# Altium PCB Power Circuit.PcbDoc
Units mm, origin at the board's own origin, x right, y up, seen from the top; angles counter-clockwise.
Board outline 131 x 104 mm, 2 copper layers (Top Layer, Bottom Layer), stack 1.1 mm thick; 30 components, 16 nets, 76 pads, 2 vias.
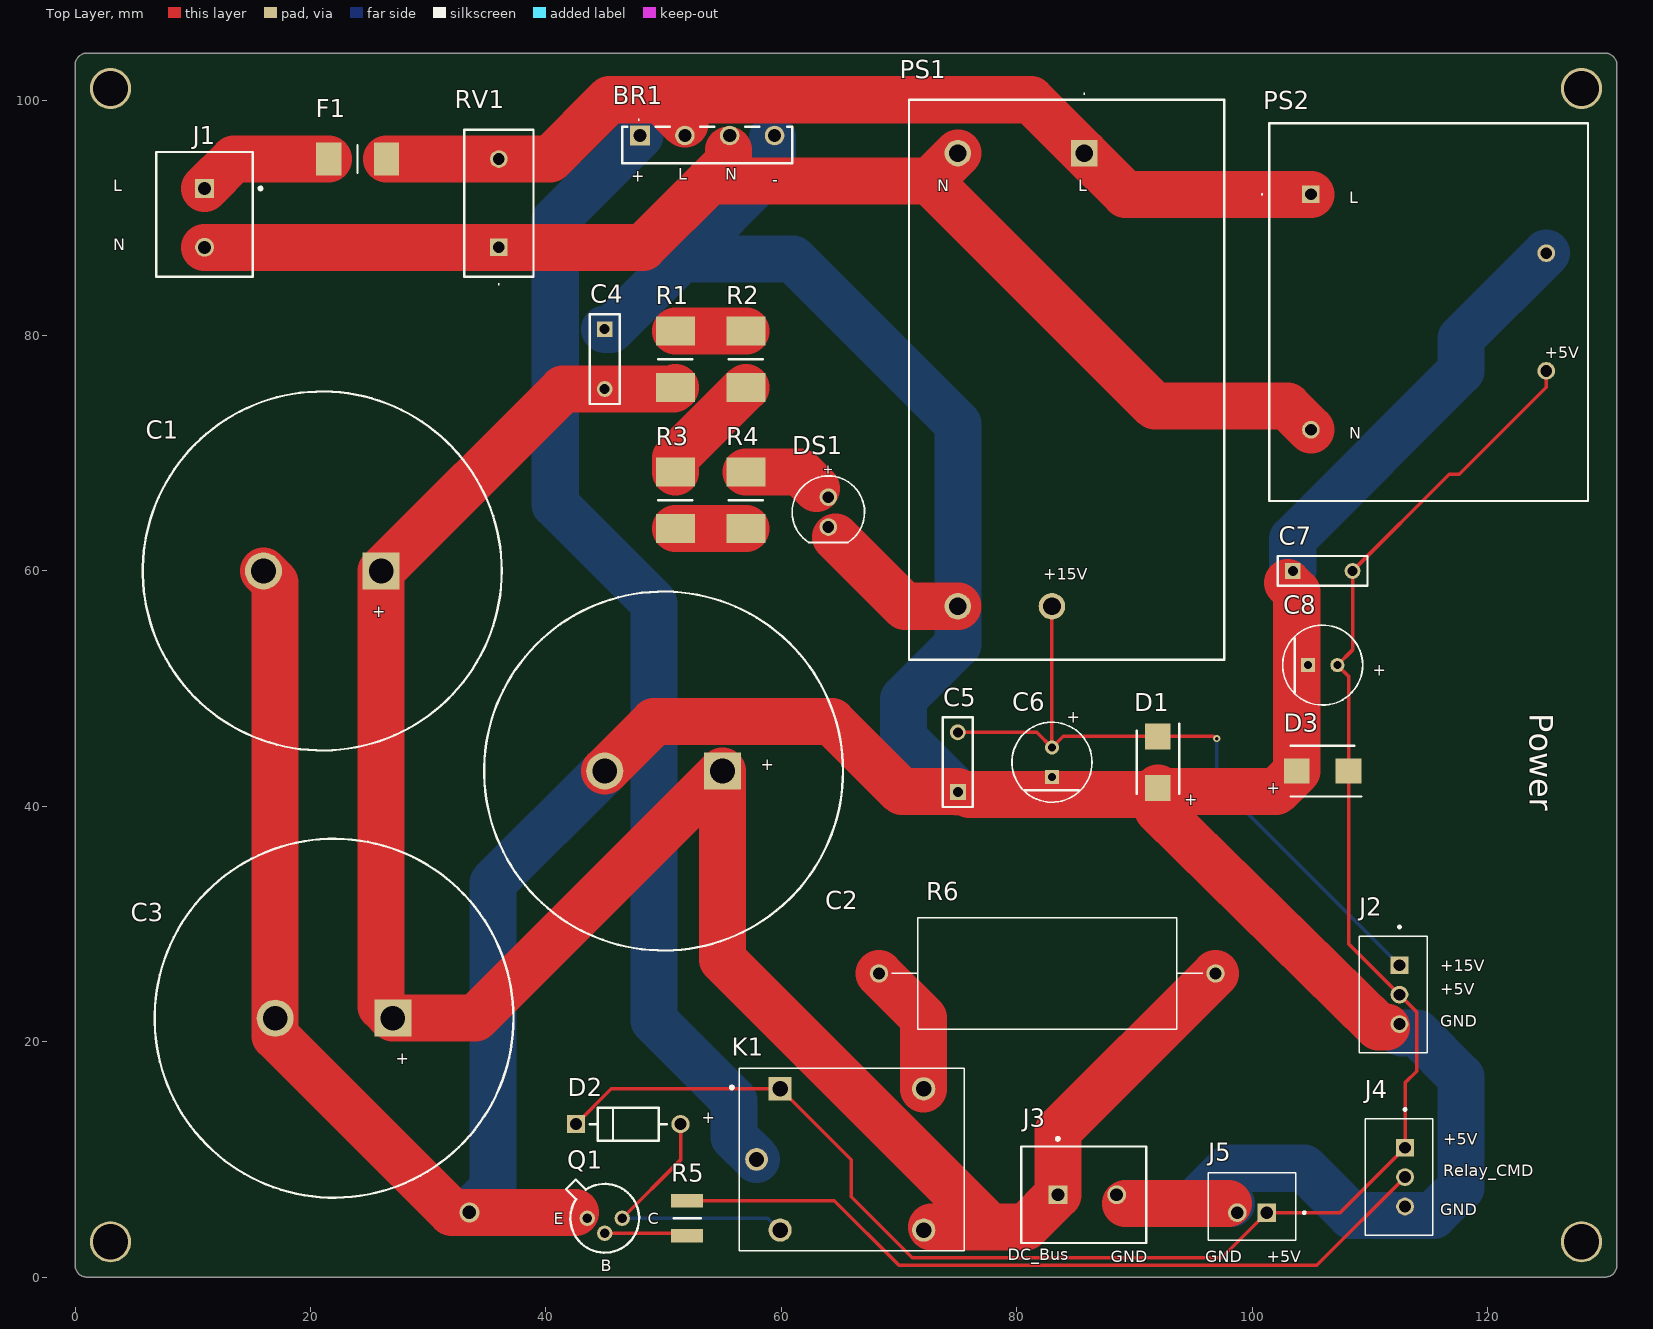
[diagram p0: Top Layer view]
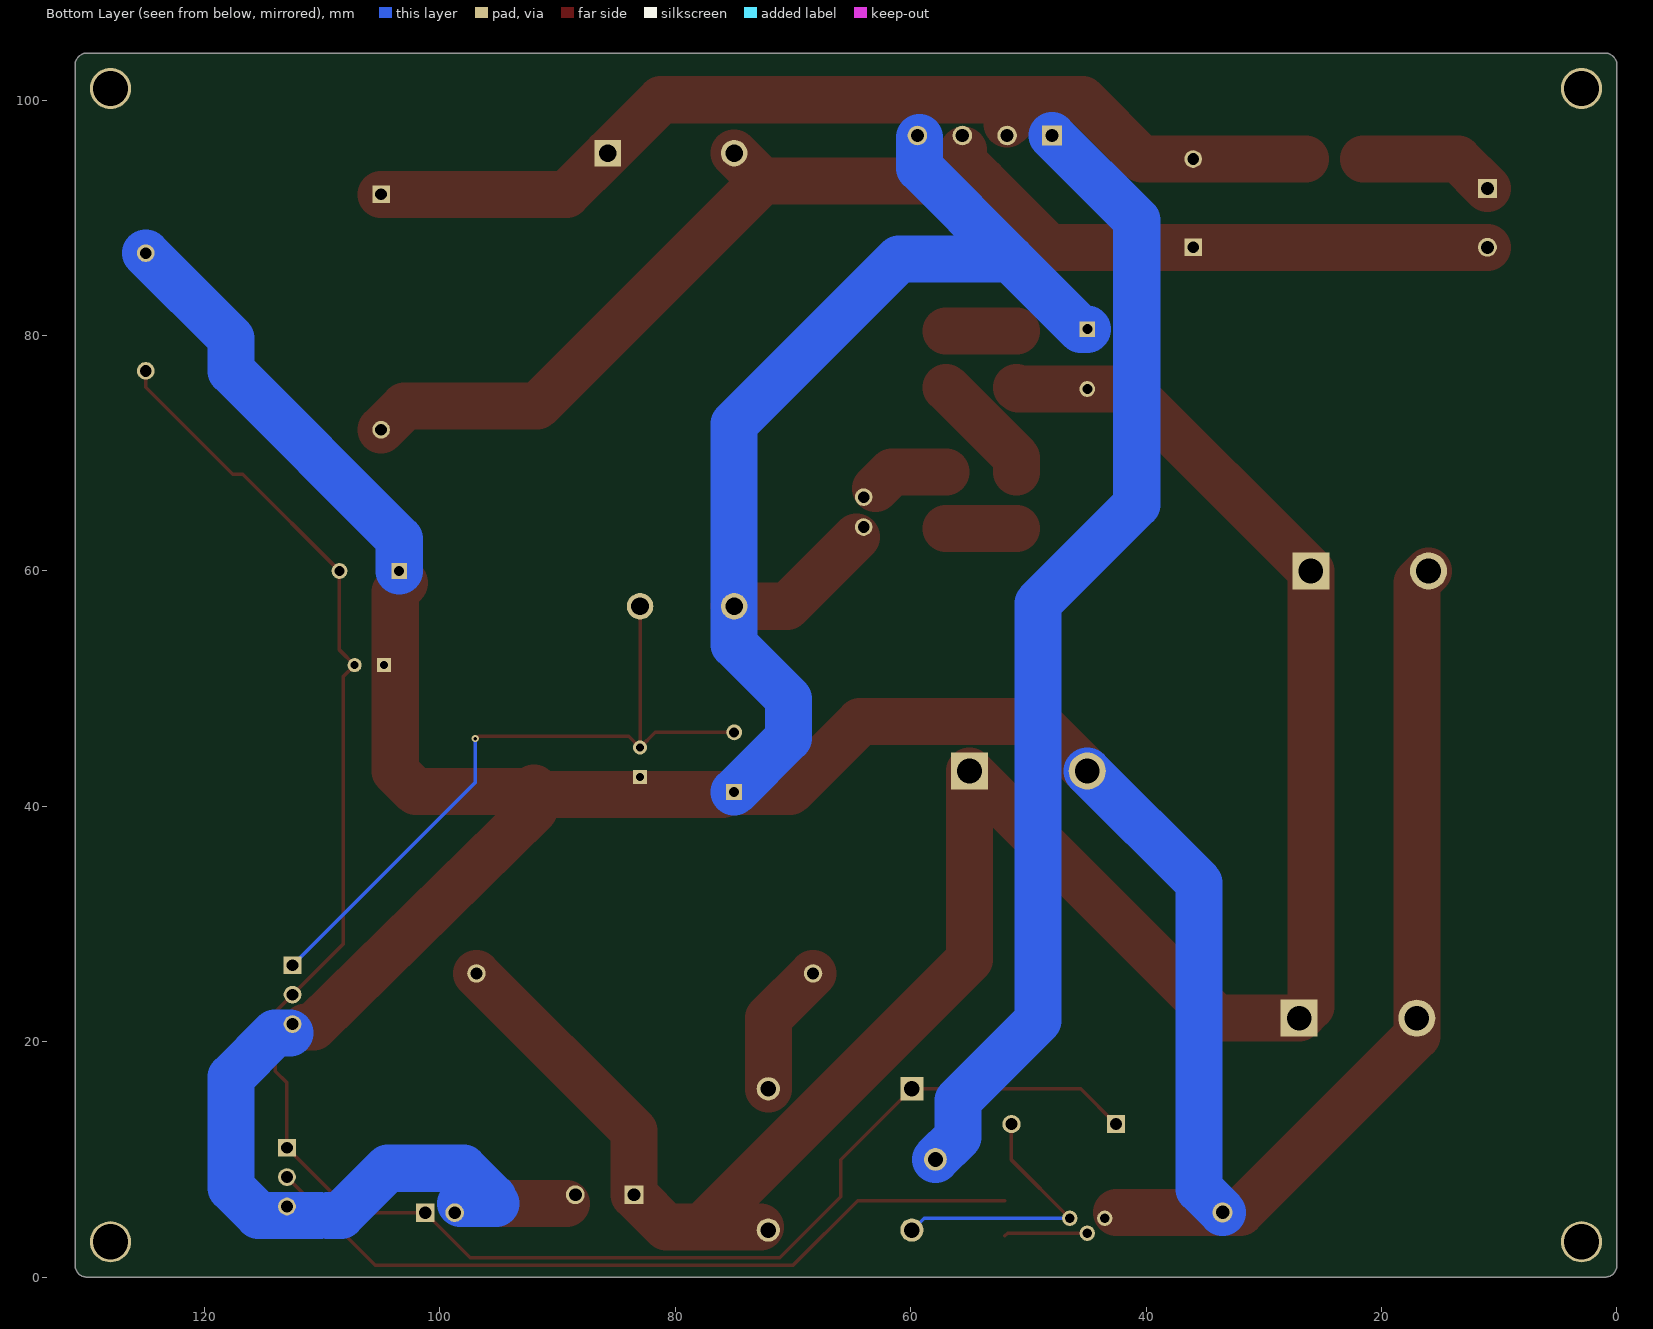
[diagram p1: Bottom Layer view, seen from below]

## Layer stack, top to bottom
Top Solder: solder mask 0.05, Solder Resist, Dk 3.5
Top Layer: signal copper 0.1
Dielectric 1: dielectric 0.9, FR-4, Dk 4.8
Bottom Layer: signal copper 0.1
Bottom Solder: solder mask 0.05, Solder Resist, Dk 3.5

## Board outline
1,0 cw(c1,1) 0,1 0,103 cw(c1,103) 1,104 130,104 cw(c130,103) 131,103 131,1 cw(c130,1) 130,0

## Design rules (kind name [scope] priority, off if disabled: settings)
BoardOutlineClearance [All] p1: gap=0.2 ignorepadtopadclearanceinfootprint=FALSE
Clearance [All] p1: gap=0.203 ignorepadtopadclearanceinfootprint=FALSE except(0.25: Arc-Hole Track-Hole SMDPad-Hole THPad-Hole Via-Hole Fill-Hole Poly-Hole Region-Hole Text-Hole)
ComponentClearance [All] p1: gap=0.127 collisioncheckmode=3 verticalgap=0.127 showdistances=TRUE
DiffPairsRouting [All] p1: maxlimit=0.381 minlimit=0.203 mostfreqgap=0.203 toplayer_minwidth=0.203 toplayer_maxwidth=25.4 toplayer_prefwidth=0.203 bottomlayer_minwidth=0.203 bottomlayer_maxwidth=25.4 bottomlayer_prefwidth=0.203 maxuncoupledlength=12.7
Height [All] p1: minheight=0 maxheight=1816.048 prefheight=12.7
HoleSize [All] p1: absolutevalues=TRUE maxlimit=6.3 minlimit=0.3 maxpercent=80.000 minpercent=20.000
HoleToHoleClearance [All] p1: gap=0.25 allowstackedmicrovias=FALSE
MinimumAnnularRing [All] p1: minimumring=0.076
MinimumSolderMaskSliver [All] p1: minsoldermaskwidth=0
PlaneClearance [All] p1: clearance=0.203
PlaneConnect PlaneConnectPowerPads [InPadClass('PowerPads')] p1: planeconnectstyle=Direct reliefexpansion=0.508 reliefentries=4 reliefconductorwidth=0.254 reliefairgap=0.254
PlaneConnect [All] p2: pad.planeconnectstyle=Relief pad.reliefexpansion=0.3 pad.reliefentries=4 pad.reliefconductorwidth=0.203 pad.reliefairgap=0.203 via.planeconnectstyle=Direct via.reliefexpansion=0.3 via.reliefentries=4 via.reliefconductorwidth=0.127 via.reliefairgap=0.127
PolygonConnect PolygonConnectPowerPads [All vs (InPadClass('PowerPads'))] p1: connectstyle=Direct reliefconductorwidth=0.254 reliefentries=4 polygonreliefangle="90 Angle" airgapwidth=0.254
PolygonConnect [All] p2: thpad.connectstyle=Relief thpad.reliefconductorwidth=0.203 thpad.reliefentries=4 thpad.polygonreliefangle="90 Angle" thpad.airgapwidth=0.203 smdpad.connectstyle=Relief smdpad.reliefconductorwidth=0.203 smdpad.reliefentries=4 smdpad.polygonreliefangle="90 Angle" smdpad.airgapwidth=0.203 via.connectstyle=Direct via.reliefconductorwidth=0.127 via.reliefentries=4 via.polygonreliefangle="90 Angle" via.airgapwidth=0.127
RoutingVias [All] p1: holewidth=0.3 width=0.6 viastyle="Through Hole" minholewidth=0.3 minwidth=0.6 maxholewidth=0.6 maxwidth=6.6
SilkToSilkClearance [All] p1: silktosilkclearance=0
SilkToSolderMaskClearance [IsPad] p1: minsilkscreentomaskgap=0.127 clearancetoexposedcopper=TRUE
SolderMaskExpansion [All] p1: expansion=0.075 istentingtop=FALSE
Width [All] p1: maxlimit=4 minlimit=0.3 preferedwidth=0.3
20 further rules are at their usual default settings.

## Components (designator, comment, footprint, x,y, rotation, side; value= is the part's Value field where it differs from the comment)
BR1 "RDXK810_T0_00601" RDXK810_T0_00601 48,97 r0 top
C1 "330uF/450V" CAPPRD1000W190D3050H3200 26,60 r180 top
C2 "330uF/450V" CAPPRD1000W190D3050H3200 55,43 r180 top
C3 "330uF/450V" CAPPRD1000W190D3050H3200 27,22 r180 top
C4 "220nF/400V" FP-CK06BX105K-MFG 45,78 r270 top
C5 "1uF/50V" FP-CK06BX105K-MFG 75,43.75 r90 top
C6 "100uF/25V" FP-RAD-TH-D_6_3_0_5-L_11-MFG 83,43.75 r90 top
C7 "1uF/50V" FP-CK06BX105K-MFG 106,60 r0 top
C8 "150uF/16V" FP-RAD-TH-D_6_3_0_5-L_11-MFG 106,52 r0 top
D1 "SMBJ20A" DIOM5436X244N 92,43.75 r270 top
D2 "1N4007" FP-1N4007-MFG 47,13 r0 top value=15pF
D3 "SMBJ7.0A" DIOM5443X244N 106,43 r180 top
DS1 "151051RS11000" WL-TMRC_D5.9H8.7 64,65 r270 top
F1 "0679H8000-05" FUSC6125X279N 24,95 r0 top
J1 "282836-2" TECO-282836-2_V 11,90 r270 top
J2 "B3B-XH-A_(LF)(SN)" "JST_B3B-XH-A (LF)(SN)" 112,24 r90 top
J3 "282836-2" TECO-282836-2_V 86,7 r0 top
J4 "B3B-XH-A_(LF)(SN)" "JST_B3B-XH-A (LF)(SN)" 112.475,8.5 r90 top
J5 "B2B-XH-A_(LF)(SN)" JST_B2B-XH-A_(LF)(SN) 100,6 r0 top
K1 "SRD-05VDC-SL-C" RELAY_SRD-05VDC-SL-C 66,10 r0 top
PS1 "PSK-15D-15" PSK15D15 85.75,95.5 r270 top
PS2 "RAC05E-05SKT" RAC05E05SKT 105,92 r0 top
Q1 "2N2222" MLTC-TO-18-3 45,5 r0 top
R1 "10K" RESC6331X80N 51,78 r90 top
R2 "10K" RESC6331X80N 57,78 r270 top
R3 "10K" RESC6331X80N 51,66 r270 top
R4 "10K" RESC6331X80N 57,66 r90 top
R5 "1K" RESC3225X70N 52,5 r270 top
R6 "1K" RESAD2860W80L2200D950 82.6,25.8 r180 top
RV1 "MOV-10D561KTR" MOV10D561KTR 36,87.5 r90 top

## Footprints (in the part's own frame and the unit in brackets; to place one, negate y for a bottom-side part, rotate by r counter-clockwise, add the part's x,y. Pads: shape width x height; smd on the part's side, far side on the other; paste and mask are expansions set on the pad)
CAPPRD1000W190D3050H3200 [mm]
  rect 3.15x3.15 hole 2.1: 1(0,0)
  round 3.15 hole 2.1: 2(10,0)
  silkscreen extent -10.25,-15.25 20.25,15.25, body extent -15.49,-20.49 25.49,20.49, height 34.13
DIOM5436X244N [mm]
  rect 2.2x2.15 smd: 1(-2.2,0) 2(2.2,0)
  silkscreen extent -3.27,-1.81 2.7,1.81, body extent -2.7,-1.81 2.7,1.81, height 2.31
DIOM5443X244N [mm]
  rect 2.2x2.15 smd: 1(-2.2,0) 2(2.2,0)
  silkscreen extent -3.27,-2.16 2.7,2.16, body extent -2.7,-1.81 2.7,1.81, height 2.31
FP-1N4007-MFG [mm]
  rect 1.55x1.55 hole 1 paste-1000 mask+0: 1(-4.44,0)
  round 1.55 hole 1 paste-1000 mask+0: 2(4.44,0)
  silkscreen extent -3.26,-1.4 3.26,1.4, body extent -5.32,-1.5 5.32,1.5, height 0.25
FP-CK06BX105K-MFG [mm]
  rect 1.35x1.35 hole 0.85 paste-1000 mask+0: 1(-2.54,0)
  round 1.35 hole 0.85 paste-1000 mask+0: 2(2.54,0)
  silkscreen extent -3.81,-1.27 3.81,1.27, body extent -3.91,-1.37 3.91,1.37, height 0.25
FP-RAD-TH-D_6_3_0_5-L_11-MFG [mm]
  rect 1.2x1.2 hole 0.7 paste-1000 mask+0: 1(-1.25,0)
  round 1.2 hole 0.7 paste-1000 mask+0: 2(1.25,0)
  silkscreen extent -3.4,-3.4 3.4,3.4, body extent -3.5,-3.5 3.5,3.5, height 0.25
FUSC6125X279N [mm]
  rect 2.15x2.8 smd: 1(-2.455,0) 2(2.455,0)
  silkscreen extent 0,-1.17 0,1.17, body extent -3.05,0 3.05,2.79, height 1.27
JST_B2B-XH-A_(LF)(SN) [mm]
  rect 1.575x1.575 / inner round 1.575 / far side rect 1.575x1.575 hole 1.05: 1(1.25,-0.525)
  round 1.575 hole 1.05: 2(-1.25,-0.525)
  silkscreen extent -3.7,-2.88 4.54,2.88, body extent -3.7,-2.88 3.7,2.88, height 7
"JST_B3B-XH-A (LF)(SN)" [mm]
  rect 1.508x1.508 / inner round 1.508 / far side rect 1.508x1.508 hole 1: 1(2.5,-0.525)
  round 1.508 hole 1: 2(0,-0.525) 3(-2.5,-0.525)
  silkscreen extent -4.95,-2.88 5.85,2.88, body extent -4.95,-2.88 4.95,2.88, height 7
MLTC-TO-18-3 [mm] "TO-18, 3-Leads"
  round 1.3 hole 0.8: 1(-1.485,0) 2(0,-1.27) 3(1.485,0)
  silkscreen extent -3.29,-2.92 2.92,3.29, body extent -3.29,-2.93 2.93,3.29, height 5.33
MOV10D561KTR [mm]
  rect 1.5x1.5 hole 1: 1(0,0)
  round 1.5 hole 1: 2(7.5,0)
  silkscreen extent -3.2,-2.95 10,2.95, body extent -2.5,-2.95 10,2.95, height 15.6
PSK15D15 [mm]
  rect 2.25x2.25 hole 1.5: 1(0,0)
  round 2.25 hole 1.5: 2(0,-10.75) 3(38.5,-10.75) 4(38.5,-2.75)
  silkscreen extent -5.1,-14.9 43.05,11.9, body extent -4.55,-14.9 43.05,11.9, height 23.6
RAC05E05SKT [mm]
  rect 1.5x1.5 hole 1: 1(0,0)
  round 1.5 hole 1: 5(0,-20) 7(20,-15) 9(20,-5)
  silkscreen extent -4.2,-26.05 23.55,6.05, body extent -3.55,-26.05 23.55,6.05, height 21.9
RDXK810_T0_00601 [mm]
  rect 1.665x1.665 hole 1.11: 1(0,0)
  round 1.665 hole 1.11: 2(3.81,0) 3(7.62,0) 4(11.43,0)
  silkscreen extent -1.51,-2.35 12.94,1.4, body extent -1.51,-2.35 12.94,0.75, height 13
RELAY_SRD-05VDC-SL-C [mm]
  rect 1.98x1.98 / inner round 1.98 / far side rect 1.98x1.98 hole 1.32: A1(-6.1,6)
  round 1.98 hole 1.32: A2(-6.1,-6) NC(6.1,6) NO(6.1,-6)
  round 1.935 hole 1.29: COM(-8.1,0)
  silkscreen extent -10.3,-7.75 9.55,7.75, body extent -9.6,-7.8 9.6,7.8, height 15.8
RESAD2860W80L2200D950 [mm]
  round 1.575 hole 1.05: 1(-14.3,0) 2(14.3,0)
  silkscreen extent -13.19,-4.75 13.19,4.75
RESC3225X70N [mm]
  rect 1.15x2.7 smd: 1(-1.5,0) 2(1.5,0)
  silkscreen extent 0,-1.15 0,1.15, body extent -1.6,-1.25 1.6,1.25, height 0.7
RESC6331X80N [mm]
  rect 2.45x3.3 smd: 1(-2.4,0) 2(2.4,0)
  silkscreen extent 0,-1.45 0,1.45, body extent -3.15,-1.55 3.15,1.55, height 0.8
TECO-282836-2_V [mm] "Female Header, Pitch 5mm, 1 x 2 Position, Height 10mm"
  rect 1.6x1.6 hole 1.1: 1(-2.5,0)
  round 1.6 hole 1.1: 2(2.5,0)
  silkscreen extent -5.6,-4.1 5,4.88, body extent -5.6,-4.1 5,4.1, height 10
WL-TMRC_D5.9H8.7 [mm] "THT Mono-color Round Color LED, 2-leads"
  round 1.5 hole 1: 1(-1.27,0) 2(1.27,0)
  silkscreen extent -3.07,-3.07 2.58,3.08, body extent -2.95,-2.95 2.45,2.95, height 9.2

## Part data
BR1: "Bridge Rectifier", Manufacturer_Name=PANJIT, Mouser Part Number=241-RDXK810_T0_00601, Datasheet Link=https://www.panjit.com.tw/upload/datasheet/RDXK810.pdf, Height=12.9mm, Manufacturer_Part_Number=RDXK810_T0_00601, Mouser Price/Stock=https://www.mouser.co.uk/ProductDetail/Panjit/RDXK810_T0_00601?qs=pBunHO6%252BwtELvZflFp%2FYiw%3D%3D
C1 C2 C3: library part B43647B5337M057, "Capacitor Polarised", Manufacturer_Name=TDK, Mouser Part Number=871-B43647B5337M057, Datasheet Link=https://product.tdk.com/system/files/dam/doc/product/capacitor/aluminum-electrolytic/snap-in/data_sheet/20/30/db/aec/b43647.pdf, Height=32mm, Manufacturer_Part_Number=B43647B5337M057, Mouser Price/Stock=https://www.mouser.co.uk/ProductDetail/EPCOS-TDK/B43647B5337M057?qs=vmHwEFxEFR%2FSdH8%2FO0wcVA%3D%3D
C4 C5 C7: library part CMP-03020-034658-1, "CAP CER 1UF 50V BX RADIAL", Capacitance=1uF, Case/Package=Molded, Dielectric=X7R, Max Operating Temperature=125°C, Min Operating Temperature=-55°C, Package Quantity=100, Resistor Type=Ceramic, Tolerance=10%, Voltage Rating=50V, Construction=RADIAL, Depth=2.29mm, Dissipation Factor=2.5%, Features=Military, Height=7.37mm, Height - Seated (Max)=0.3inch, Lead Diameter=0.635mm, Lead Pitch=5.08mm, Lead/Base Style=Straight, Length=7.37mm, Mount="Through Hole", Number of Pins=2, Packaging=Bulk, Pitch=5.08mm, Radiation Hardening=No, REACH SVHC="No SVHC", RoHS Compliant=No, Series="Military, MIL-C-11015, CK06", Termination=Radial, Voltage Rating (DC)=50V, Width=0.09inch
C6 C8: library part CMP-05427-000141-1, "Aluminum Electrolytic Capacitors (Radial Lead Type) AEC-Q200 Qualified 100uF ±20% 25V", Capacitance=100uF, Case/Package=Radial, Max Operating Temperature=105°C, Min Operating Temperature=-55°C, Package Quantity=2000, Ripple Current=130mA, Tolerance=20%, Voltage Rating=25V, Construction=RADIAL, Contact Plating=Tin, Diameter=6.3mm, Height=11.2mm, Height - Seated (Max)=0.48inch, Lead Diameter=0.5mm, Lead Pitch=2.5mm, Lead/Base Style=Straight, Length=11.2mm, Life (Hours)=1000Hour, Mount="Through Hole", Packaging="Ammo Pack", Radiation Hardening=No, RoHS Compliant=Yes, Series=NHG, Termination=Radial, Voltage Rating (DC)=25V, Width=6.3mm
D1: "TVS Diode (Uni-directional)", Manufacturer_Name=Bourns, Mouser Part Number=652-SMBJ20A, Arrow Part Number=SMBJ20A, Arrow Price/Stock=https://www.arrow.com/en/products/smbj20a/bourns?region=nac, Datasheet Link=https://www.bourns.com/docs/product-datasheets/smbj.pdf?sfvrsn=34552159_17, Height=2.44mm, Manufacturer_Part_Number=SMBJ20A, Mouser Price/Stock=https://www.mouser.co.uk/ProductDetail/Bourns/SMBJ20A?qs=%252Bf8Cd6aE5bx0luBLnSoXTg%3D%3D
D2: library part CMP-123542-000001-1, "Rectifier diode 1000 V 1 A DO-41, ,", Capacitance=15pF, Forward Current=1A, Manufacturer=Diotec, Max Junction Temp=+175°C, Max Repetitive Reverse Voltage=1000V, Max Surge Forward Current=27A, Peak Reverse Current=5uA, Temperature="-50°C to +175°C", Temperature Range Low=-50°C, Automotive=No, Category=Diode, ComponentLink2Description=Datasheet, ComponentLink2URL=https://datasheet.octopart.com/1N4007-Diotec-datasheet-62346875.pdf, Device Class L1="Discrete Semiconductors", Device Class L2=Diodes, Device Class L3="Rectifier Diodes", Height=2.8mm, Ipc Land Pattern Name=DIOAD888W100L520D280, Lead Free=Yes, Manufacturer Part Number=1N4007, Octopart=https://octopart.com/1n4007-diotec-4040411, Package=1N4007, Reverse Voltage=1000V, RoHS=TRUE, Temperature Range High=+175°C
D3: "TVS Diode (Uni-directional)", Manufacturer_Name=Bourns, Mouser Part Number=652-SMBJ7.0A, Arrow Part Number=SMBJ7.0A, Arrow Price/Stock=https://www.arrow.com/en/products/smbj7.0a/bourns?region=nac, Datasheet Link=https://www.bourns.com/docs/Product-Datasheets/SMBJ.pdf, Height=2.44mm, Manufacturer_Part_Number=SMBJ7.0A, Mouser Price/Stock=https://www.mouser.co.uk/ProductDetail/Bourns/SMBJ7.0A?qs=%252Bf8Cd6aE5bwMIb6NdbDGfg%3D%3D
DS1: library part CMP-1488-00008-2, Case/Package=Radial, Color=Red, Forward Current=100mA, Forward Voltage=2.1V, Max Operating Temperature=85°C, Max Reverse Voltage (DC)=5V, Min Operating Temperature=-40°C, Test Current=20mA, Dominant Wavelength=645nm, Height=8.6mm, Length=5mm, Lens Size=5mm, Lens Style="Circular, Diffused, Round", Luminous Intensity=30mcd, Mount="Through Hole", NexarPartId=29717813, Packaging=Bulk, Peak Wavelength=650nm, REACH SVHC=Unknown, RoHS=Compliant, Viewing Angle=60°, Wavelength=630nm, Width=5mm
F1: "Fuse", Manufacturer_Name="Bel Circuit Protection", Arrow Part Number=0679H8000-05, Arrow Price/Stock=https://www.arrow.com/en/products/0679h8000-05/bel-group?region=nac, Datasheet Link=https://www.mouser.ec/datasheet/2/643/ds_cp_0679h_series-1290853.pdf, Height=2.79mm, Manufacturer_Part_Number=0679H8000-05
J1 J3: library part CMP-1684-00017-1, "Female Header, Pitch 5 mm, 1 x 2 Position, Height 10 mm, Tail Length 3.5 mm, Rohs, Bulk", Color=Green, Current=13.5A, Manufacturer="TE Connectivity", Package Description="Female Header, Pitch 5 mm, 1 x 2 Position, Height 10 mm, Tail Length 3.5 mm", Package Reference=THD, Standard Package=300, Voltage=300V, 3D Model=282836-2.pdf, Category=Connectors,Interconnects, Clamp Material - Plating=Brass-NickelPlated, Contact Material - Plating=Brass-TinPlated, Datasheet URL=http://www.te.com.cn/commerce/DocumentDelivery/DDEController?Action=showdoc&DocId=Catalog+Section%7F1308389_EUROSTYLE_TERMINAL_BLOCKS%7F0607%7Fpdf%7FEnglish%7FENG_CS_1308389_EUROSTYLE_TERMINAL_BLOCKS_0607.pdf%7F282836-2, Dynamic Catalog=BuchananSeries, Family=TerminalBlocks-WiretoBoard, Featured Product=EurostyleTerminalBlockConnectors, Features=Interlocking(Side), Housing Material=Polyamide(PA66),Nylon6/6, Manufacturer URL=http://www.te.com, Mating Orientation=HorizontalwithBoard, Mounting Type=ThroughHole, Number of Levels=1, Other Names="5ULV-02B / A98076", Packaging=Bulk, Pitch="0.197\"(5.00mm)", Positions Per Level=2, Product Training Modules=Wire-to-BoardEurostyleTerminalBlocks, RoHS Information=282836-2StatementofCompliance, Screw Material - Plating=Brass-NickelPlated, Screw Thread=M3, Series=Buchanan, Torque - Screw=0.68Nm(6Lb-In), Wire Gauge=16-30AWG, Wire Termination=Screw-RisingCageClamp
J2 J4: "Connector Header Through Hole 3 position 0.098 (2.50mm)", Package=None, Check_prices=https://www.snapeda.com/parts/B3B-XH-A%20(LF)(SN)/JST+Sales+America+Inc./view-part/?ref=eda, MF="JST Sales America Inc.", MP="B3B-XH-A (LF)(SN)", SnapEDA_Link=https://www.snapeda.com/parts/B3B-XH-A%20(LF)(SN)/JST+Sales+America+Inc./view-part/?ref=snap
J5: "Connector Header Through Hole 2 position 0.098 (2.50mm)", Package=None, Check_prices=https://www.snapeda.com/parts/B2B-XH-A%20(LF)(SN)/JST+Sales+America+Inc./view-part/?ref=eda, MF="JST Sales", MP="B2B-XH-A (LF)(SN)", SnapEDA_Link=https://www.snapeda.com/parts/B2B-XH-A%20(LF)(SN)/JST+Sales+America+Inc./view-part/?ref=snap
K1: "5V Trigger Relay Module For Arduino And Raspberry Pi 5V Trigger Relay Module For Arduino And Raspberry Pi", Package="NON STANDARD-5 Songle Relay", Availability="Not in stock", Check_prices=https://www.snapeda.com/parts/SRD-05VDC-SL-C/Songle+Relay/view-part/?ref=eda, MF="Songle Relay", MP=SRD-05VDC-SL-C, Price=None, SnapEDA_Link=https://www.snapeda.com/parts/SRD-05VDC-SL-C/Songle+Relay/view-part/?ref=snap
PS1: "Power Supply", Manufacturer_Name="CUI Inc.", Mouser Part Number=490-PSK-15D-15, Datasheet Link=https://www.cui.com/product/resource/psk-15d.pdf, Height=24mm, Manufacturer_Part_Number=PSK-15D-15, Mouser Price/Stock=https://www.mouser.co.uk/ProductDetail/CUI-Inc/PSK-15D-15?qs=DRkmTr78QATxDRJPOzDh%252BA%3D%3D
PS2: "Power Supply", Manufacturer_Name="RECOM Power", Mouser Part Number=919-RAC05E-05SKT, Arrow Part Number=RAC05E-05SKT, Arrow Price/Stock=https://www.arrow.com/en/products/rac05e-05skt/recom-power?region=nac, Datasheet Link=https://recom-power.com/pdf/Powerline_AC-DC/RAC05E-KT.pdf, Height=22mm, Manufacturer_Part_Number=RAC05E-05SKT, Mouser Price/Stock=https://www.mouser.co.uk/ProductDetail/RECOM-Power/RAC05E-05SKT?qs=7D1LtPJG0i1k%2FYw%252BRylc5g%3D%3D
Q1: library part CMP-2000-05237-1, "Low Power Bipolar NPN Transistor, 30 V, -65 to 200 degC, 3-Pin TO-18, RoHS, Bulk", Collector Emitter Voltage V(br)ceo=30V, Collector Emitter Voltage Vces=400mV, Continuous Collector Current Ic Max=800mA, Current Ic @ Vce Sat=150mA, DC Current Gain hFE=100, Full Power Rating Temperature=25degC, Manufacturer=Multicomp, Package / Case=TO-18, Package Description="3-Pin Transistor Outline Package (TO-18), Dia 5.54 mm, Pitch Pitch 1.485mm", Package Reference=TO-18-3, Power Dissipation Pd=500mW, Voltage Vcbo=60V, Current Ic Continuous a Max=800mA, Current Ic hFE=150mA, Datasheet URL=http://www.farnell.com/datasheets/1662272.pdf, Datasheet Version="Rev. 1.1, 05/2012", DC Collector Current=800mA, Gain Bandwidth ft Min=250MHz, Gain Bandwidth ft Typ=250MHz, Hfe Min=100, Manufacturer URL=http://uk.farnell.com/b/multicomp, No. of Pins=3, No. of Transistors=1, Pin Configuration=a, Power Dissipation Ptot Max=500mW, SVHC=NoSVHC(19-Dec-2012), Transistor Case Style=TO-18, Transistor Polarity=NPN
R1 R2 R3 R4: library part CRM2512QJW-103ELF, "Resistor", Manufacturer_Name=Bourns, Mouser Part Number=652-CRM2512QJW-103E, Arrow Part Number=CRM2512QJW-103ELF, Arrow Price/Stock=https://www.arrow.com/en/products/crm2512qjw-103elf/bourns?region=nac, Datasheet Link=http://www.bourns.com/data/global/pdfs/CRM0805_1206_2010.pdf, Height=0.8mm, Manufacturer_Part_Number=CRM2512QJW-103ELF, Mouser Price/Stock=https://www.mouser.co.uk/ProductDetail/Bourns/CRM2512QJW-103ELF?qs=8Wlm6%252BaMh8Rzg3bRHdWGsA%3D%3D
R5: library part ERJ-T14LK102U, "Resistor", Manufacturer_Name=Panasonic, Mouser Part Number=667-ERJ-T14LK102U, Datasheet Link=https://componentsearchengine.com/Datasheets/1/ERJ-T14LK102U.pdf, Height=0.7mm, Manufacturer_Part_Number=ERJ-T14LK102U, Mouser Price/Stock=https://www.mouser.co.uk/ProductDetail/Panasonic/ERJ-T14LK102U?qs=69hQ%2F0d5SwhjOR8VGTtd5Q%3D%3D
R6: library part SQP500JB-1K, Package=None, Availability=Unavailable, MF="{'manufacturer': u'YAGEO'}", MP=SQP500JB-1K, Price=None
RV1: "Varistor", Manufacturer_Name=Bourns, Mouser Part Number=652-MOV-10D561KTR, Datasheet Link=https://www.bourns.com/docs/Product-Datasheets/MOV10D.pdf, Height=15.5mm, Manufacturer_Part_Number=MOV-10D561KTR, Mouser Price/Stock=https://www.mouser.co.uk/ProductDetail/Bourns/MOV-10D561KTR?qs=lgttKnAd%252B2CzitieoxdOpg%3D%3D

## Free pads (board coordinates)
  round 3.5 hole 3: 5(3,3) 5(3,101) 5(128,3) 5(128,101)

## Via types
v1: diameter 0.6, hole 0.3, Top Layer to Bottom Layer, 1 vias
v2: diameter 1.695, hole 1.13, Top Layer to Bottom Layer, 1 vias

## Nets (pads, with @x,y where several pads share a name; then routed paths per layer and width w, separated by ;. In a path a pad name is that pad's centre, name@x,y a point inside that pad or via, vN(x,y) a via of type N, cw(c..) or ccw(c..) an arc to the next point about the centre after c; other vN are vias at no path point)
+5V: C7.2 C8.2 D2.1 D3.1 J2.2 J4.1 J5.1 K1.A1 PS2.7 | length 160.4
  Top Layer w0.3: D2.1 45.56,16 K1.A1 65.933,9.967 65.933,6.839 71.125,1.647 97.422,1.647 J5.1 107.475,5.475 J4.1 113,16.505 114,17.505 114,22.525 J2.2 108.2,28.325 D3.1 108.2,51.05 C8.2 108.54,53.29 C7.2 116.756,68.216 117.616,68.216 125,75.6 PS2.7
+15V: C5.2 C6.2 D1.1 J2.1 PS1.4 | length 60.7
  Top Layer w0.3: C5.2 81.71,46.29 C6.2 ; PS1.4 C6.2 ; v1(97,45.75) 96.919,45.75 96.719,45.95 D1.1 83.95,45.95 C6.2
  Bottom Layer w0.3: v1(97,45.75) 97,42.025 J2.1
AC_OUT_L: BR1.2 F1.2 PS1.1 PS2.1 RV1.2 | length 86.9
  Top Layer w4: F1.2 RV1.2 40.355,95 45.39,100.036 49.745,100.036 ; 51.81,97.971 49.745,100.036 ; PS2.1 89.25,92 PS1.1 81.214,100.036 49.745,100.036
AC_OUT_N: BR1.3 J1.2 PS1.2 PS2.5 RV1.1 | length 111.7
  Top Layer w4: J1.2 RV1.1 48.254,87.5 53.877,93.123 ; 55.5,95.75 55.5,94.746 53.877,93.123 ; PS1.2 72.623,93.123 ; PS2.5 103,74 91.746,74 72.623,93.123 ; 53.877,93.123 72.623,93.123
DC_Bus: C1.1 C2.1 C3.1 C4.2 J3.1 K1.NO R1.1 R6.1 | length 190.8
  Top Layer w4: R1.1 50.86,75.46 C4.2 41.46,75.46 C1.1 26,23 C3.1 34,22 C2.1 55,27 77.25,4.75 77.25,4.25 ; K1.NO@72.75,4.25 77.25,4.25 ; R6.1 83.5,12.4 J3.1 80.75,4.25 77.25,4.25
GND: BR1.4 C1.2 C2.2 C3.2 C4.1 C5.1 C6.1 C7.1 C8.1 D1.2 D3.2 DS1.2 J2.3 J3.2 J4.3 J5.2 PS1.3 PS2.9 Q1.1 | length 410.6
  Top Layer w4: C1.2 17,59 C3.2 17,20.5 32,5.5 v2(33.5,5.5) 42.5,5.5 ; C2.2 49.203,47.203 64.297,47.203 70.25,41.25 74.96,41.25 C5.1 ; 64.625,62.875 70.5,57 PS1.3 ; 76,41 83,41 91.45,41 D1.2 ; 89.25,6.25 98,6.25 ; 103,59 103.8,58.2 D3.2 102.05,41.25 92.3,41.25 D1.2 ; 111.4,21.251 110.762,21.246 92.015,39.686 D1.2
  Bottom Layer w4: v2(33.5,5.5) 35.5,7.5 35.5,33.5 C2.2 ; C4.1 45.54,80.54 51.5,86.5 ; BR1.4@59.25,96.82 59.25,94.25 51.5,86.5 ; C5.1 70.387,45.823 70.387,49.137 75,53.75 PS1.3 75,72.5 61,86.5 51.5,86.5 ; 95.25,6.25 98.25,6.25 ; 95.5,6.75 98,9.25 104.425,9.25 108.425,5.25 109.5,5.25 ; C7.1 103.46,62.71 117.75,77 117.75,79.75 PS2.9 ; 110.25,5.25 115.407,5.25 117.75,7.593 117.75,17 114,20.75 112.75,20.75
NetD2_2: D2.2 K1.A2 Q1.3 | length 23.9
  Top Layer w0.3: Q1.3 51.44,9.955 D2.2
  Bottom Layer w0.3: Q1.3 58.864,5 59.864,4 K1.A2
NetDS1_1: DS1.1 R4.2 | length 6.6
  Top Layer w4: R4.2 61.6,68.4 63,67
NetF1_1: F1.1 J1.1 | length 11.6
  Top Layer w4: J1.1 13.5,95 F1.1
NetK1_NC: K1.NC R6.2 | length 11.4
  Top Layer w4: R6.2 72.1,22 K1.NC
NetQ1_2: Q1.2 R5.2 | length 7.1
  Top Layer w0.3: Q1.2 51.77,3.73 R5.2
NetR1_2: R1.2 R2.1 | length 6
  Top Layer w4: R1.2 R2.1
NetR2_2: R2.2 R3.1 | length 9.7
  Top Layer w4: R3.1 51,69.609 56.991,75.6 R2.2
NetR3_2: R3.2 R4.1 | length 6
  Top Layer w4: R3.2 R4.1
Relay_CMD: J4.2 R5.1 | length 66.4
  Top Layer w0.3: R5.1 64.5,6.5 70,1 105.5,1 J4.2
Relay_In: BR1.1 K1.COM | length 97.1
  Bottom Layer w4: BR1.1 40.797,89.797 40.797,65.653 49.203,57.247 49.203,21.797 56,15 56,11.9 K1.COM

## Silkscreen, mask and mechanical layers (free items; w line width, h text height)
Top Overlay:
  text "L" at 51.254,93.254 h1
  text "N" at 55.254,93.254 h1
  text "+" at 47.254,93.087 h1
  text "-" at 59.254,92.754 h1
  text "L" at 3.254,92.254 h1
  text "N" at 73.254,92.254 h1
  text "L" at 85.254,92.254 h1
  text "L" at 108.254,91.254 h1
  text "N" at 3.254,87.254 h1
  text "+5V" at 124.854,78.054 h1
  text "N" at 108.254,71.254 h1
  text "+15V" at 82.254,59.254 h1
  text "+" at 25.254,56.087 h1
  text "+" at 110.254,51.087 h1
  text "Power" at 123.6,47.9 h2 r270
  text "+" at 84.254,47.087 h1
  text "+" at 58.254,43.087 h1
  text "+" at 101.254,41.087 h1
  text "+" at 94.254,40.087 h1
  text "+15V" at 116,26 h1
  text "+5V" at 116,24 h1
  text "GND" at 116.004,21.254 h1
  text "+" at 27.254,18.087 h1
  text "+" at 53.254,13.087 h1
  text "+5V" at 116.254,11.254 h1
  text "Relay_CMD" at 116.254,8.587 h1
  text "GND" at 116.004,5.254 h1
  text "E" at 40.667,4.5 h1
  text "C" at 48.667,4.5 h1
  text "DC_Bus" at 79.254,1.421 h1
  text "GND" at 88.004,1.254 h1
  text "GND" at 96.004,1.254 h1
  text "+5V" at 101.254,1.254 h1
  text "B" at 44.667,0.5 h1
Mechanical 1:
  the board outline again, w0.5

## Text inside footprints (layer, text, board x,y; h text height)
DS1: Top Overlay "+" at 63.67,69.05 h0.8 r270